# EAGLE board brain2_v11 (EAGLE 9.6.2)
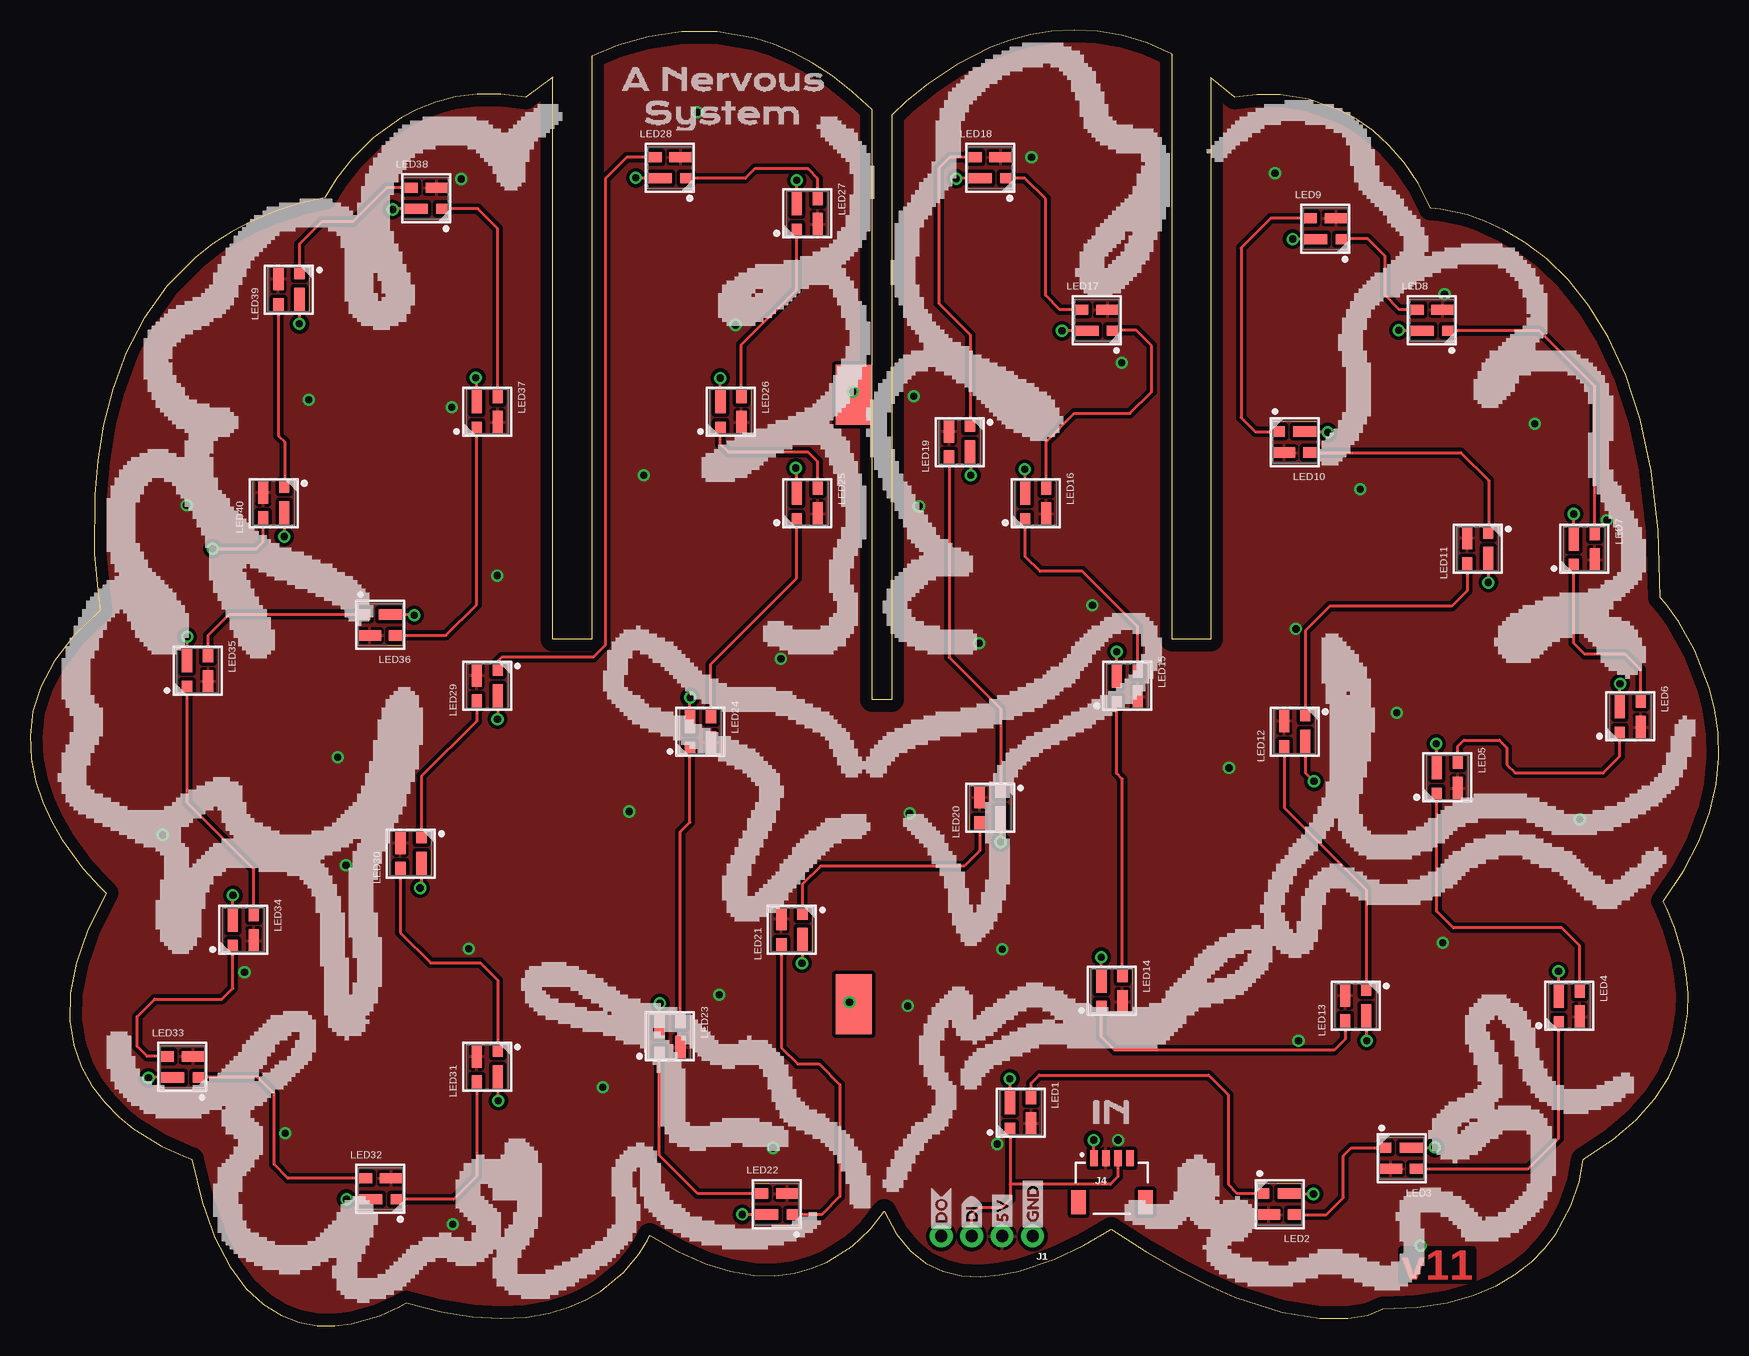
[diagram p0: board, top side]
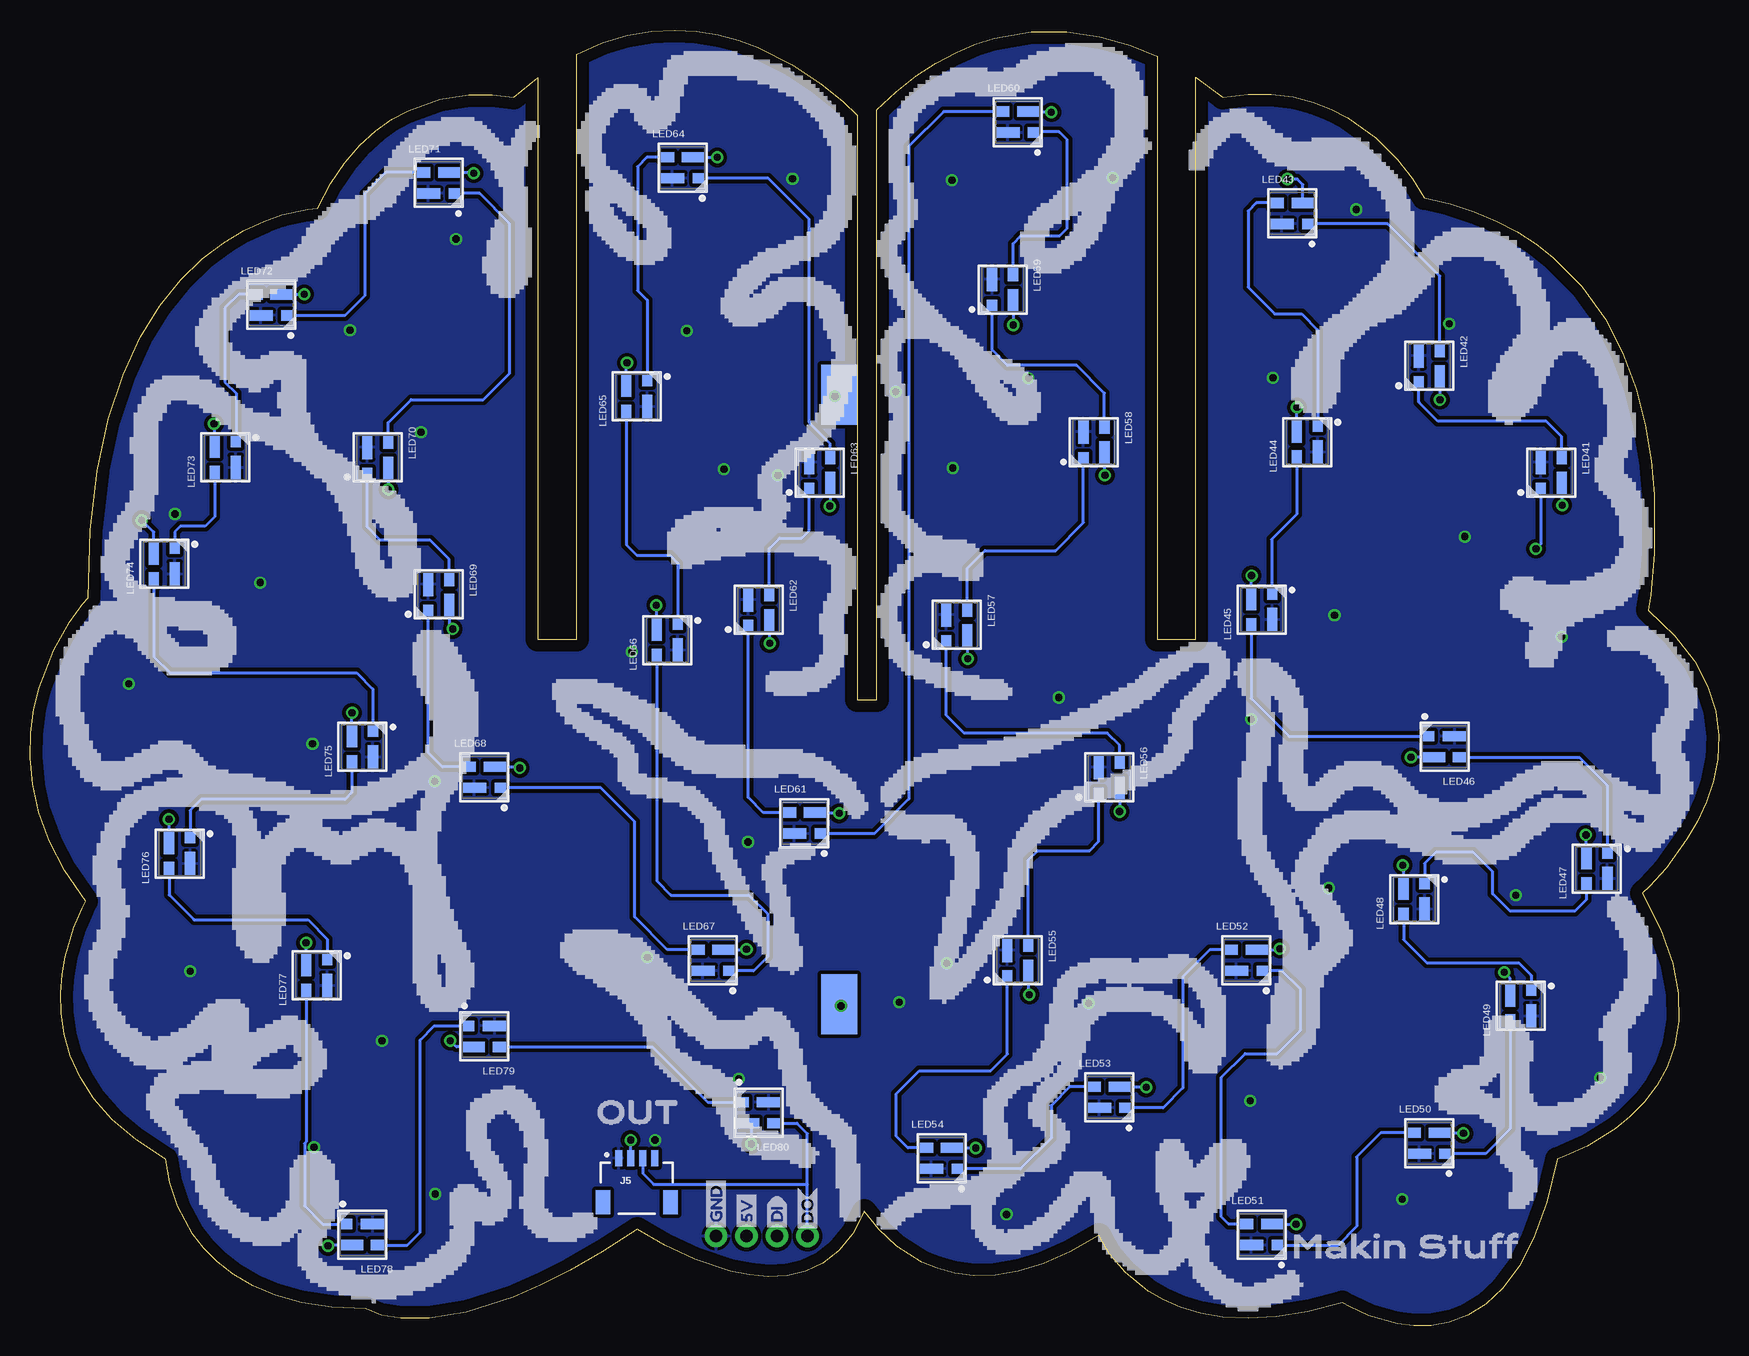
[diagram p1: board, bottom side, seen from below]

Size 140.73 x 107.98 mm. Coordinates in mm from the lower left corner, seen from the top.
Outline: 135.87,60.67 135.69,66.31 135.11,71.26 134.19,75.55 132.98,79.25 131.53,82.38 129.92,85.01 128.18,87.17 126.39,88.91 124.6,90.27 122.86,91.31 121.23,92.06 119.77,92.57 117.58,93.06 116.75,93.14 115.68,95.19 114.5,96.93 113.25,98.38 111.93,99.57 110.58,100.52 109.22,101.26 106.57,102.2 104.17,102.58 102.21,102.6 100.42,102.38 98.41,103.99 98.41,57.21 95.18,57.21 95.18,105.98 93.05,106.91 90.98,107.53 88.96,107.88 87.02,107.98 85.15,107.87 83.36,107.57 81.67,107.11 80.08,106.53 77.22,105.1 74.85,103.52 73.02,102.03 71.79,100.87 71.79,52.18 70.17,52.18 70.17,101.32 68.52,102.85 66.87,104.15 65.23,105.23 63.6,106.1 61.98,106.79 60.39,107.3 57.28,107.84 54.33,107.85 51.57,107.44 49.04,106.72 46.8,105.81 46.8,57.21 43.57,57.21 43.57,104.03 41.32,102.38 39.22,102.64 37.27,102.64 35.47,102.41 33.81,101.98 32.29,101.39 30.92,100.68 28.59,99 26.8,97.22 25.55,95.61 24.56,94 22.37,93.48 20.35,92.83 18.5,92.05 16.79,91.16 15.24,90.16 13.83,89.06 11.41,86.62 9.48,83.92 7.99,81.03 6.88,78.04 6.12,75.02 5.63,72.07 5.38,69.24 5.37,64.32 5.67,60.9 5.86,59.62 3.65,57.5 2.01,55.38 0.9,53.27 0.25,51.19 0,49.17 0.09,47.22 0.46,45.36 1.05,43.61 1.8,41.99 2.65,40.53 4.39,38.13 5.79,36.58 6.37,36.03 4.83,32.99 3.85,30.21 3.37,27.69 3.32,25.42 3.65,23.39 4.29,21.58 5.16,19.99 6.22,18.61 7.4,17.42 8.62,16.43 10.97,14.97 12.75,14.15 13.46,13.89 14.33,10.29 15.4,7.34 16.63,4.97 17.98,3.15 19.42,1.79 20.92,0.86 22.44,0.29 23.95,0.02 25.4,0 26.78,0.17 29.15,0.84 30.77,1.58 31.37,1.93 34.25,1.18 36.87,0.75 39.22,0.62 41.34,0.72 43.21,1.04 44.86,1.54 46.31,2.16 47.55,2.89 49.47,4.47 50.74,5.98 51.43,7.1 51.64,7.55 54.05,6.15 56.29,5.16 58.38,4.53 60.3,4.22 62.07,4.19 63.67,4.39 65.12,4.78 66.41,5.31 68.52,6.64 70.02,8.02 71.2,9.55 72.17,7.67 73.33,6.23 74.65,5.21 76.1,4.54 77.62,4.19 79.21,4.1 80.8,4.24 82.38,4.55 85.35,5.54 87.81,6.69 90.12,8.05 93.03,6.17 95.72,4.62 98.2,3.37 100.46,2.39 104.36,1.13 107.47,0.62 109.83,0.61 111.47,0.9 112.73,1.4 115.59,1.54 118.1,1.94 120.29,2.55 122.17,3.35 123.78,4.3 125.13,5.35 126.25,6.48 127.15,7.65 128.41,9.94 129.09,11.94 129.42,13.89 131.88,15.48 133.85,17.16 135.4,18.91 136.55,20.7 137.36,22.5 137.87,24.29 138.13,26.03 138.17,27.7 138.04,29.28 137.78,30.74 137.07,33.17 136.39,34.79 136.09,35.38 137.83,37.93 139.12,40.41 140,42.81 140.52,45.12 140.73,47.33 140.67,49.42 140.4,51.37 139.95,53.17 138.73,56.29 137.4,58.65 136.32,60.15 135.87,60.67
Copper layers (1*16): Top 0.035mm / dielectric 1.5mm / Bottom 0.035mm
Design rules "default": minimum track width 6mil, minimum drill 0.35mm, track to track 6mil, track to pad 6mil, pad to pad 6mil, via to via 6mil, smd to smd 6mil, copper to edge 40mil, drill to drill 6mil, minimum pad ring 10mil, minimum via ring 8mil, stop-mask expansion 4mil, vias tented up to drill 0mil, thermal gap 10mil
tKeepout: area 43.6,-2.7 to 46.5,57.1; area 70.2,7.2 to 71.7,52.2; area 95.2,2.9 to 98.3,57.2
bKeepout: area 95.1,0.9 to 98.4,57.2; area 70.1,5.7 to 71.8,52.2; area 43.4,-2.2 to 46.8,57.2

## Footprints (pad centres in the part's own frame; a part is rotated, then mirrored left to right if it is on the bottom)
1X04_NO_SILK = drill 1.016 pad 1.88: 1 0,0; 2 2.54,0; 3 5.08,0; 4 7.62,0
JST04_1MM_RA = smd 0.6 x 1.35: 1 -1.5,0; 2 -0.5,0; 3 0.5,0; 4 1.5,0 | smd 1.2 x 2: NC1 2.8,-3.675; NC2 -2.8,-3.675
5X3_SOLDER_PAD = smd 5 x 3: P$1 0,0
3.5X3.5_RGB_LED = smd 1.15 x 0.85: 1 -1.275,0.875 | smd 2 x 0.85: 2 -0.85,-0.875 | smd 1 x 0.85: 3 1.35,-0.875 | smd 1.9 x 0.85: 4 0.9,0.875

## Placement (x,y rotation side)
FRAME1  FRAME-LEDGER  [CREATIVE_COMMONS]  -80.02,1.25 0 top  (outside the outline)
FRAME2  FRAME-LEDGER  [CREATIVE_COMMONS]  -80.02,10.14 0 top  (outside the outline)
FRAME3  FRAME-LEDGER  [CREATIVE_COMMONS]  -80.02,19.03 0 top  (outside the outline)
J1  [1X04_NO_SILK]  83.56,7.48 180 top
J4  [JST04_1MM_RA]  90.16,13.95 0 top
J5  [JST04_1MM_RA]  90.16,13.95 0 bottom
J6  ELECTRO_MECH_PAD  [5X3_SOLDER_PAD]  68.65,77.58 90 top
J7  ELECTRO_MECH_PAD  [5X3_SOLDER_PAD]  68.65,26.78 90 top
J8  ELECTRO_MECH_PAD  [5X3_SOLDER_PAD]  73.27,77.58 270 bottom
J9  ELECTRO_MECH_PAD  [5X3_SOLDER_PAD]  73.27,26.78 270 bottom
LED1  3.5X3.5_RGB_LED3.5X3.5  [3.5X3.5_RGB_LED]  82.54,17.76 270 top
LED2  3.5X3.5_RGB_LED3.5X3.5  [3.5X3.5_RGB_LED]  104.13,10.14 180 top
LED3  3.5X3.5_RGB_LED3.5X3.5  [3.5X3.5_RGB_LED]  114.29,13.95 180 top
LED4  3.5X3.5_RGB_LED3.5X3.5  [3.5X3.5_RGB_LED]  128.26,26.65 270 top
LED5  3.5X3.5_RGB_LED3.5X3.5  [3.5X3.5_RGB_LED]  118.1,45.7 270 top
LED6  3.5X3.5_RGB_LED3.5X3.5  [3.5X3.5_RGB_LED]  133.34,50.78 270 top
LED7  3.5X3.5_RGB_LED3.5X3.5  [3.5X3.5_RGB_LED]  129.53,64.75 270 top
LED8  3.5X3.5_RGB_LED3.5X3.5  [3.5X3.5_RGB_LED]  116.83,83.8 0 top
LED9  3.5X3.5_RGB_LED3.5X3.5  [3.5X3.5_RGB_LED]  107.94,91.42 0 top
LED10  3.5X3.5_RGB_LED3.5X3.5  [3.5X3.5_RGB_LED]  105.4,73.64 180 top
LED11  3.5X3.5_RGB_LED3.5X3.5  [3.5X3.5_RGB_LED]  120.64,64.75 90 top
LED12  3.5X3.5_RGB_LED3.5X3.5  [3.5X3.5_RGB_LED]  105.4,49.51 90 top
LED13  3.5X3.5_RGB_LED3.5X3.5  [3.5X3.5_RGB_LED]  110.48,26.65 90 top
LED14  3.5X3.5_RGB_LED3.5X3.5  [3.5X3.5_RGB_LED]  90.16,27.92 270 top
LED15  3.5X3.5_RGB_LED3.5X3.5  [3.5X3.5_RGB_LED]  91.43,53.32 270 top
LED16  3.5X3.5_RGB_LED3.5X3.5  [3.5X3.5_RGB_LED]  83.81,68.56 270 top
LED17  3.5X3.5_RGB_LED3.5X3.5  [3.5X3.5_RGB_LED]  88.89,83.8 0 top
LED18  3.5X3.5_RGB_LED3.5X3.5  [3.5X3.5_RGB_LED]  80,96.5 0 top
LED19  3.5X3.5_RGB_LED3.5X3.5  [3.5X3.5_RGB_LED]  77.46,73.64 90 top
LED20  3.5X3.5_RGB_LED3.5X3.5  [3.5X3.5_RGB_LED]  80,43.16 90 top
LED21  3.5X3.5_RGB_LED3.5X3.5  [3.5X3.5_RGB_LED]  63.49,33 90 top
LED22  3.5X3.5_RGB_LED3.5X3.5  [3.5X3.5_RGB_LED]  62.22,10.14 0 top
LED23  3.5X3.5_RGB_LED3.5X3.5  [3.5X3.5_RGB_LED]  53.33,24.11 270 top
LED24  3.5X3.5_RGB_LED3.5X3.5  [3.5X3.5_RGB_LED]  55.87,49.51 270 top
LED25  3.5X3.5_RGB_LED3.5X3.5  [3.5X3.5_RGB_LED]  64.76,68.56 270 top
LED26  3.5X3.5_RGB_LED3.5X3.5  [3.5X3.5_RGB_LED]  58.41,76.18 270 top
LED27  3.5X3.5_RGB_LED3.5X3.5  [3.5X3.5_RGB_LED]  64.76,92.69 270 top
LED28  3.5X3.5_RGB_LED3.5X3.5  [3.5X3.5_RGB_LED]  53.33,96.5 0 top
LED29  3.5X3.5_RGB_LED3.5X3.5  [3.5X3.5_RGB_LED]  38.09,53.32 90 top
LED30  3.5X3.5_RGB_LED3.5X3.5  [3.5X3.5_RGB_LED]  31.74,39.35 90 top
LED31  3.5X3.5_RGB_LED3.5X3.5  [3.5X3.5_RGB_LED]  38.09,21.57 90 top
LED32  3.5X3.5_RGB_LED3.5X3.5  [3.5X3.5_RGB_LED]  29.2,11.41 0 top
LED33  3.5X3.5_RGB_LED3.5X3.5  [3.5X3.5_RGB_LED]  12.69,21.57 0 top
LED34  3.5X3.5_RGB_LED3.5X3.5  [3.5X3.5_RGB_LED]  17.77,33 270 top
LED35  3.5X3.5_RGB_LED3.5X3.5  [3.5X3.5_RGB_LED]  13.96,54.59 270 top
LED36  3.5X3.5_RGB_LED3.5X3.5  [3.5X3.5_RGB_LED]  29.2,58.4 180 top
LED37  3.5X3.5_RGB_LED3.5X3.5  [3.5X3.5_RGB_LED]  38.09,76.18 270 top
LED38  3.5X3.5_RGB_LED3.5X3.5  [3.5X3.5_RGB_LED]  33.01,93.96 0 top
LED39  3.5X3.5_RGB_LED3.5X3.5  [3.5X3.5_RGB_LED]  21.58,86.34 90 top
LED40  3.5X3.5_RGB_LED3.5X3.5  [3.5X3.5_RGB_LED]  20.31,68.56 90 top
LED41  3.5X3.5_RGB_LED3.5X3.5  [3.5X3.5_RGB_LED]  13.96,71.1 270 bottom
LED42  3.5X3.5_RGB_LED3.5X3.5  [3.5X3.5_RGB_LED]  24.12,79.99 270 bottom
LED43  3.5X3.5_RGB_LED3.5X3.5  [3.5X3.5_RGB_LED]  35.55,92.69 0 bottom
LED44  3.5X3.5_RGB_LED3.5X3.5  [3.5X3.5_RGB_LED]  34.28,73.64 90 bottom
LED45  3.5X3.5_RGB_LED3.5X3.5  [3.5X3.5_RGB_LED]  38.09,59.67 90 bottom
LED46  3.5X3.5_RGB_LED3.5X3.5  [3.5X3.5_RGB_LED]  22.85,48.24 180 bottom
LED47  3.5X3.5_RGB_LED3.5X3.5  [3.5X3.5_RGB_LED]  10.15,38.08 90 bottom
LED48  3.5X3.5_RGB_LED3.5X3.5  [3.5X3.5_RGB_LED]  25.39,35.54 90 bottom
LED49  3.5X3.5_RGB_LED3.5X3.5  [3.5X3.5_RGB_LED]  16.5,26.65 90 bottom
LED50  3.5X3.5_RGB_LED3.5X3.5  [3.5X3.5_RGB_LED]  24.12,15.22 0 bottom
LED51  3.5X3.5_RGB_LED3.5X3.5  [3.5X3.5_RGB_LED]  38.09,7.6 0 bottom
LED52  3.5X3.5_RGB_LED3.5X3.5  [3.5X3.5_RGB_LED]  39.36,30.46 0 bottom
LED53  3.5X3.5_RGB_LED3.5X3.5  [3.5X3.5_RGB_LED]  50.79,19.03 0 bottom
LED54  3.5X3.5_RGB_LED3.5X3.5  [3.5X3.5_RGB_LED]  64.76,13.95 0 bottom
LED55  3.5X3.5_RGB_LED3.5X3.5  [3.5X3.5_RGB_LED]  58.41,30.46 270 bottom
LED56  3.5X3.5_RGB_LED3.5X3.5  [3.5X3.5_RGB_LED]  50.79,45.7 270 bottom
LED57  3.5X3.5_RGB_LED3.5X3.5  [3.5X3.5_RGB_LED]  63.49,58.4 270 bottom
LED58  3.5X3.5_RGB_LED3.5X3.5  [3.5X3.5_RGB_LED]  52.06,73.64 270 bottom
LED59  3.5X3.5_RGB_LED3.5X3.5  [3.5X3.5_RGB_LED]  59.68,86.34 270 bottom
LED60  3.5X3.5_RGB_LED3.5X3.5  [3.5X3.5_RGB_LED]  58.41,100.31 0 bottom
LED61  3.5X3.5_RGB_LED3.5X3.5  [3.5X3.5_RGB_LED]  76.19,41.89 0 bottom
LED62  3.5X3.5_RGB_LED3.5X3.5  [3.5X3.5_RGB_LED]  80,59.67 270 bottom
LED63  3.5X3.5_RGB_LED3.5X3.5  [3.5X3.5_RGB_LED]  74.92,71.1 270 bottom
LED64  3.5X3.5_RGB_LED3.5X3.5  [3.5X3.5_RGB_LED]  86.35,96.5 0 bottom
LED65  3.5X3.5_RGB_LED3.5X3.5  [3.5X3.5_RGB_LED]  90.16,77.45 90 bottom
LED66  3.5X3.5_RGB_LED3.5X3.5  [3.5X3.5_RGB_LED]  87.62,57.13 90 bottom
LED67  3.5X3.5_RGB_LED3.5X3.5  [3.5X3.5_RGB_LED]  83.81,30.46 0 bottom
LED68  3.5X3.5_RGB_LED3.5X3.5  [3.5X3.5_RGB_LED]  102.86,45.7 0 bottom
LED69  3.5X3.5_RGB_LED3.5X3.5  [3.5X3.5_RGB_LED]  106.67,60.94 270 bottom
LED70  3.5X3.5_RGB_LED3.5X3.5  [3.5X3.5_RGB_LED]  111.75,72.37 270 bottom
LED71  3.5X3.5_RGB_LED3.5X3.5  [3.5X3.5_RGB_LED]  106.67,95.23 0 bottom
LED72  3.5X3.5_RGB_LED3.5X3.5  [3.5X3.5_RGB_LED]  120.64,85.07 0 bottom
LED73  3.5X3.5_RGB_LED3.5X3.5  [3.5X3.5_RGB_LED]  124.45,72.37 90 bottom
LED74  3.5X3.5_RGB_LED3.5X3.5  [3.5X3.5_RGB_LED]  129.53,63.48 90 bottom
LED75  3.5X3.5_RGB_LED3.5X3.5  [3.5X3.5_RGB_LED]  113.02,48.24 90 bottom
LED76  3.5X3.5_RGB_LED3.5X3.5  [3.5X3.5_RGB_LED]  128.26,39.35 90 bottom
LED77  3.5X3.5_RGB_LED3.5X3.5  [3.5X3.5_RGB_LED]  116.83,29.19 90 bottom
LED78  3.5X3.5_RGB_LED3.5X3.5  [3.5X3.5_RGB_LED]  113.02,7.6 180 bottom
LED79  3.5X3.5_RGB_LED3.5X3.5  [3.5X3.5_RGB_LED]  102.86,24.11 180 bottom
LED80  3.5X3.5_RGB_LED3.5X3.5  [3.5X3.5_RGB_LED]  80,17.76 180 bottom
U$1  A_NERVOUS0  [A_NERVOUS0]  47.74,103.87 0 top
U$2  SYSTEM1  [SYSTEM1]  49.52,101.07 0 top
U$3  MAKIN_STUFF2  [MAKIN_STUFF2]  37.2,6.59 0 bottom
U$4  5V1  [5V1]  81.02,7.73 90 top
U$5  5V1  [5V1]  81.02,7.73 90 bottom
U$6  GND0  [GND0]  83.56,7.73 90 top
U$7  GND0  [GND0]  83.56,7.73 90 bottom
U$8  DI0  [DI0]  78.48,7.73 90 top
U$9  DI0  [DI0]  78.48,7.73 90 bottom
U$10  DO3  [DO3]  75.94,7.6 90 top
U$11  DO3  [DO3]  75.94,7.6 90 bottom
U$12  IN0  [IN0]  86.86,17.76 0 top
U$13  OUT1  [OUT1]  95.12,17.76 0 bottom
U$14  BRAIN2_PCB_TOP_SILK  [BRAIN2_PCB_TOP_SILK]  69.84,54.59 0 top
U$15  BRAIN2_PCB_BOT_SILK  [BRAIN2_PCB_BOT_SILK]  70.35,54.21 0 bottom

## Library data of the parts
FRAME1-FRAME3 = SparkFun-Aesthetics
J1 = SparkFun-Connectors
J4 J5 = SparkFun-Connectors; COLOR: BLACK; PROD_ID: CONN-13694
J6-J9 LED1-LED80 U$1-U$15 = brain

## Nets
5V: J1.2 J4.2 J5.2 LED1.4 LED2.4 LED3.4 LED4.4 LED5.4 LED6.4 LED7.4 LED8.4 LED9.4 LED10.4 LED11.4 LED12.4 LED13.4 LED14.4 LED15.4 LED16.4 LED17.4 LED18.4 LED19.4 LED20.4 LED21.4 LED22.4 LED23.4 LED24.4 LED25.4 LED26.4 LED27.4 LED28.4 LED29.4 LED30.4 LED31.4 LED32.4 LED33.4 LED34.4 LED35.4 LED36.4 LED37.4 LED38.4 LED39.4 LED40.4 LED41.4 LED42.4 LED43.4 LED44.4 LED45.4 LED46.4 LED47.4 LED48.4 LED49.4 LED50.4 LED51.4 LED52.4 LED53.4 LED54.4 LED55.4 LED56.4 LED57.4 LED58.4 LED59.4 LED60.4 LED61.4 LED62.4 LED63.4 LED64.4 LED65.4 LED66.4 LED67.4 LED68.4 LED69.4 LED70.4 LED71.4 LED72.4 LED73.4 LED74.4 LED75.4 LED76.4 LED77.4 LED78.4 LED79.4 LED80.4
DI: J1.3 J4.3 LED1.3
DO: J1.4 J5.3 LED80.1
DO_1: LED40.1 LED41.3
GND: J1.1 J4.1 J5.1 LED1.2 LED2.2 LED3.2 LED4.2 LED5.2 LED6.2 LED7.2 LED8.2 LED9.2 LED10.2 LED11.2 LED12.2 LED13.2 LED14.2 LED15.2 LED16.2 LED17.2 LED18.2 LED19.2 LED20.2 LED21.2 LED22.2 LED23.2 LED24.2 LED25.2 LED26.2 LED27.2 LED28.2 LED29.2 LED30.2 LED31.2 LED32.2 LED33.2 LED34.2 LED35.2 LED36.2 LED37.2 LED38.2 LED39.2 LED40.2 LED41.2 LED42.2 LED43.2 LED44.2 LED45.2 LED46.2 LED47.2 LED48.2 LED49.2 LED50.2 LED51.2 LED52.2 LED53.2 LED54.2 LED55.2 LED56.2 LED57.2 LED58.2 LED59.2 LED60.2 LED61.2 LED62.2 LED63.2 LED64.2 LED65.2 LED66.2 LED67.2 LED68.2 LED69.2 LED70.2 LED71.2 LED72.2 LED73.2 LED74.2 LED75.2 LED76.2 LED77.2 LED78.2 LED79.2 LED80.2
N$1: LED1.1 LED2.3
N$2: LED2.1 LED3.3
N$3: LED3.1 LED4.3
N$4: LED4.1 LED5.3
N$5: LED6.1 LED7.3
N$6: LED7.1 LED8.3
N$7: LED8.1 LED9.3
N$8: LED9.1 LED10.3
N$9: LED11.1 LED12.3
N$10: LED5.1 LED6.3
N$11: LED12.1 LED13.3
N$12: LED13.1 LED14.3
N$13: LED14.1 LED15.3
N$14: LED16.1 LED17.3
N$15: LED17.1 LED18.3
N$16: LED18.1 LED19.3
N$17: LED19.1 LED20.3
N$18: LED15.1 LED16.3
N$19: LED21.1 LED22.3
N$20: LED22.1 LED23.3
N$21: LED23.1 LED24.3
N$22: LED24.1 LED25.3
N$23: LED26.1 LED27.3
N$24: LED27.1 LED28.3
N$25: LED28.1 LED29.3
N$26: LED29.1 LED30.3
N$27: LED25.1 LED26.3
N$28: LED31.1 LED32.3
N$29: LED32.1 LED33.3
N$30: LED33.1 LED34.3
N$31: LED34.1 LED35.3
N$32: LED36.1 LED37.3
N$33: LED37.1 LED38.3
N$34: LED38.1 LED39.3
N$35: LED39.1 LED40.3
N$36: LED35.1 LED36.3
N$37: LED10.1 LED11.3
N$38: LED20.1 LED21.3
N$39: LED30.1 LED31.3
N$40: LED41.1 LED42.3
N$41: LED42.1 LED43.3
N$42: LED43.1 LED44.3
N$43: LED44.1 LED45.3
N$44: LED46.1 LED47.3
N$45: LED47.1 LED48.3
N$46: LED48.1 LED49.3
N$47: LED49.1 LED50.3
N$48: LED45.1 LED46.3
N$49: LED51.1 LED52.3
N$50: LED52.1 LED53.3
N$51: LED53.1 LED54.3
N$52: LED54.1 LED55.3
N$53: LED56.1 LED57.3
N$54: LED57.1 LED58.3
N$55: LED58.1 LED59.3
N$56: LED59.1 LED60.3
N$57: LED55.1 LED56.3
N$58: LED61.1 LED62.3
N$59: LED62.1 LED63.3
N$60: LED63.1 LED64.3
N$61: LED64.1 LED65.3
N$62: LED66.1 LED67.3
N$63: LED67.1 LED68.3
N$64: LED68.1 LED69.3
N$65: LED69.1 LED70.3
N$66: LED65.1 LED66.3
N$67: LED71.1 LED72.3
N$68: LED72.1 LED73.3
N$69: LED73.1 LED74.3
N$70: LED74.1 LED75.3
N$71: LED76.1 LED77.3
N$72: LED77.1 LED78.3
N$73: LED78.1 LED79.3
N$74: LED79.1 LED80.3
N$75: LED75.1 LED76.3
N$76: LED50.1 LED51.3
N$77: LED60.1 LED61.3
N$78: LED70.1 LED71.3

## Tracks (layer width: path | path; a pad name or v marks a point on that pad's centre or on a via)
5V  (via drill 0.6)
  Bottom 0.254: LED41.4 13.09,68.42 v13.05,68.38 | LED42.4 23.25,77.19 v23.23,77.17 | LED43.4 34.65,95.09 35.12,95.56 v35.93,95.56 | LED44.4 35.16,76.53 v35.15,76.54 | LED45.4 38.97,62.48 v38.93,62.52 | LED46.4 25.64,47.37 v25.65,47.38 | LED47.4 11.03,40.86 v11.07,40.9 | LED48.4 26.27,38.32 v26.33,38.39 | LED49.4 17.38,28.95 v17.87,29.45 | LED50.4 21.34,16.1 v21.28,16.04 | LED51.4 35.23,8.48 v35.22,8.47 | LED52.4 36.66,31.34 v36.57,31.43 | LED53.4 47.76,19.91 v47.72,19.87 | LED54.4 61.93,14.83 v61.92,14.82 | LED55.4 57.54,27.68 v57.45,27.59 | LED56.4 49.92,42.87 v49.93,42.86 | LED57.4 62.62,55.62 v62.58,55.58 | LED58.4 51.19,70.91 v51.15,70.87 | LED59.4 58.81,83.41 v58.79,83.4 | LED60.4 55.68,101.19 v55.62,101.13 | LED61.4 73.36,42.77 v73.3,42.71 | LED62.4 79.13,56.92 v79.09,56.88 | LED63.4 74.05,68.35 v74.08,68.31 | LED64.4 83.47,97.38 v83.46,97.37 | LED65.4 91.04,80.18 v90.98,80.25 | LED66.4 88.5,60.01 v88.54,60.05 | LED67.4 81.06,31.34 v81.02,31.38 | LED68.4 100,46.58 v99.92,46.49 | LED69.4 105.8,58.37 v105.49,58.07 | LED70.4 110.88,69.72 v110.86,69.71 | LED71.4 103.81,96.11 v103.75,96.05 | LED72.4 117.89,85.95 v117.87,85.96 | LED73.4 125.33,75.1 v125.39,75.17 | LED74.4 130.41,66.14 v131.41,67.14 | LED75.4 113.9,51.08 v113.89,51.09 | LED76.4 129.14,42.21 v129.15,42.22 | LED77.4 117.71,31.9 v117.72,31.91 | LED78.4 115.83,6.73 v115.89,6.66 | LED79.4 105.19,23.24 v105.71,23.76 | LED80.4 80.61,16.6 v80.61,15.15 | J5.2 v90.66,15.47 v90.67,15.48
  other vias: 73.65,77.45 73.14,26.65
  pour Top (isolate 0.305): -0.01,-0.02 -0.01,107.93 140.96,107.93 140.96,-0.02
DI
  Top 0.254: LED1.3 81.67,11.79 | 81.67,11.79 81.67,10.52 81.03,9.89 79.11,9.89 78.48,9.25 J1.3 | J4.3 90.66,12.42 90.04,11.79 81.67,11.79
DO
  Bottom 0.254: LED80.1 76.82,16.89 75.94,16 75.94,11.79 | J1.4 75.94,11.79 | J5.3 89.66,12.69 88.77,11.79 75.94,11.79
DO_1  (via drill 0.6)
  Top 0.254: v15.23,64.75 18.86,64.75 19.44,65.33 LED40.1
  Bottom 0.254: LED41.3 14.84,65.15 v15.23,64.75
GND  (via drill 0.6)
  Top 0.254: LED1.2 81.67,20.57 v81.65,20.58 | LED2.2 106.92,11.02 v106.95,10.98 | LED3.2 117.02,14.83 v117.06,14.87 | LED4.2 127.39,29.53 v127.37,29.55 | LED5.2 117.23,48.46 v117.19,48.5 | LED6.2 132.47,53.46 v132.5,53.5 | LED7.2 128.66,67.63 v128.64,67.65 | LED8.2 114.1,82.93 v114.06,82.96 | LED9.2 105.24,90.55 v105.22,90.56 | LED10.2 108.08,74.52 v108.15,74.46 | LED11.2 121.52,61.95 v121.53,61.93 | LED13.2 111.36,23.8 v111.4,23.76 | LED14.2 89.29,30.7 v89.27,30.72 | LED15.2 90.56,56.16 v90.57,56.17 | LED16.2 82.94,71.34 v82.9,71.38 | LED17.2 86.01,82.93 v86,82.91 | LED18.2 77.22,95.63 v77.18,95.59 | LED19.2 78.4,72.73 v78.4,70.87 | LED20.2 80.88,40.33 v80.89,40.32 | LED21.2 64.37,30.25 v64.33,30.21 | LED22.2 59.36,9.27 v59.35,9.28 | LED23.2 52.46,26.84 v52.49,26.88 | LED24.2 55,52.35 v55.01,52.36 | LED25.2 63.89,71.42 v63.82,71.48 | LED26.2 57.54,78.96 v57.52,78.98 | LED27.2 63.89,95.45 v63.9,95.46 | LED28.2 50.52,95.63 v50.49,95.66 | LED29.2 38.97,50.57 v38.96,50.55 | LED30.2 32.62,36.6 v32.5,36.48 | LED31.2 38.97,18.82 v39.03,18.75 | LED32.2 26.39,10.54 v26.38,10.55 | LED33.2 9.91,20.7 v9.87,20.66 | LED34.2 16.9,35.86 v16.91,35.87 | LED35.2 13.09,57.4 v13.1,57.41 | LED36.2 31.96,59.28 v32.02,59.22 | LED37.2 37.22,78.94 v37.15,79 | LED38.2 30.28,93.09 v30.22,93.02 | LED39.2 22.46,83.51 v22.45,83.5 | LED40.2 21.19,65.78 v21.18,65.77 | LED12.2 106.28,46.1 v107,45.37 | J4.1 88.66,15.45 v88.64,15.48
  other vias: 68.57,77.83 68.29,26.96
  pour Bottom (isolate 0.305): -0.01,-0.02 -0.01,107.93 140.96,107.93 140.96,-0.02
N$1
  Top 0.254: LED1.1 83.42,20.21 84.09,20.89 98.21,20.89 99.86,19.24 99.86,11.78 100.62,11.02 LED2.3
N$2
  Top 0.254: LED2.1 108.03,9.27 109.44,10.68 109.44,14.16 110.11,14.83 LED3.3
N$3
  Top 0.254: LED3.1 124.85,13.08 127.39,15.62 LED4.3
N$4
  Top 0.254: LED4.1 129.14,31.67 127.65,33.15 118.61,33.15 117.23,34.54 LED5.3
N$5
  Top 0.254: LED6.1 134.22,54.68 132.94,55.96 129.56,55.96 128.66,56.86 LED7.3
N$6
  Top 0.254: LED7.1 130.41,78.28 125.76,82.93 LED8.3
N$7
  Top 0.254: LED9.3 109.33,90.58 111.47,90.58 112.92,89.14 112.92,85.86 114.1,84.68 LED8.1
N$8
  Top 0.254: LED9.1 103.41,92.3 100.93,89.82 100.93,75.67 102.1,74.51 LED10.3
N$9
  Top 0.254: LED11.1 119.77,61.26 118.48,59.98 108.32,59.98 106.28,57.93 LED12.3
N$10
  Top 0.254: LED5.1 118.98,48.28 119.5,48.8 122.45,48.8 123.08,48.17 123.08,46.77 123.77,46.08 131.11,46.08 132.47,47.44 LED6.3
N$11
  Top 0.254: LED12.1 104.53,43.15 111.36,36.32 LED13.3
N$12
  Top 0.254: LED13.1 109.61,23.9 108.68,22.97 90.39,22.97 89.29,24.07 LED14.3
N$13
  Top 0.254: LED14.1 91.04,45.56 90.56,46.04 LED15.3
N$14
  Top 0.254: LED16.1 84.69,73.68 87.04,76.03 91.66,76.03 93.46,77.83 93.46,81.67 92.17,82.96 90.28,82.96 LED17.3
N$15
  Top 0.254: LED17.1 85.81,84.68 84.63,85.86 84.63,93.91 82.91,95.63 LED18.3
N$16
  Top 0.254: LED18.1 76.66,97.38 75.74,96.45 75.74,85.2 78.35,82.58 78.35,75.01 LED19.3
N$17
  Top 0.254: LED19.1 76.59,55.7 80.88,51.41 LED20.3
N$18
  Top 0.254: LED15.1 92.31,58.26 87.7,62.87 84.17,62.87 82.94,64.1 LED16.3
N$19
  Top 0.254: LED21.1 62.62,23.18 63.98,21.83 65.75,21.83 67.48,20.1 67.48,10.78 65.97,9.27 LED22.3
N$20
  Top 0.254: LED22.1 55.66,11.02 52.46,14.22 LED23.3
N$21
  Top 0.254: LED23.1 54.21,41.17 55,41.96 LED24.3
N$22
  Top 0.254: LED24.1 56.75,55.14 63.89,62.28 LED25.3
N$23
  Top 0.254: LED26.1 59.29,81.76 63.89,86.36 LED27.3
N$24
  Top 0.254: LED27.1 65.64,95.6 64.84,96.4 60.39,96.4 59.62,95.63 LED28.3
N$25
  Top 0.254: LED28.1 49.74,97.38 47.95,95.59 47.95,56.73 46.95,55.72 39.33,55.72 38.97,55.36 LED29.3
N$26
  Top 0.254: LED29.1 37.22,50.39 32.62,45.79 LED30.3
N$27
  Top 0.254: LED25.1 65.64,72.01 64.86,72.78 58.21,72.78 57.54,73.45 LED26.3
N$28
  Top 0.254: LED31.1 37.22,12.44 35.31,10.54 LED32.3
N$29
  Top 0.254: LED32.1 21.49,12.29 20.34,13.44 20.34,19.34 18.98,20.7 LED33.3
N$30
  Top 0.254: LED33.1 9.76,22.45 8.93,23.27 8.93,25.76 10.38,27.21 15.99,27.21 16.9,28.11 LED34.3
N$31
  Top 0.254: LED34.1 18.65,38.05 13.09,43.61 LED35.3
N$32
  Top 0.254: LED36.1 34.65,57.53 37.22,60.09 LED37.3
N$33
  Top 0.254: LED37.1 38.97,91.44 37.32,93.09 LED38.3
N$34
  Top 0.254: LED38.1 29.75,94.84 26.92,92.01 24.33,92.01 22.46,90.14 LED39.3
N$35
  Top 0.254: LED39.1 20.71,74.19 21.23,73.67 21.23,69.95 LED40.3
N$36
  Top 0.254: LED35.1 14.84,57.52 16.6,59.29 27.84,59.29 LED36.3
N$37
  Top 0.254: LED10.1 119.23,72.77 121.56,70.44 121.56,66.14 LED11.3
N$38
  Top 0.254: LED20.1 79.13,39.6 77.84,38.31 65.88,38.31 64.37,36.8 LED21.3
N$39
  Top 0.254: LED30.1 30.87,32.76 33.39,30.23 37.53,30.23 38.97,28.8 LED31.3
N$40
  Bottom 0.254: LED41.1 13.09,74.09 14.39,75.4 23.41,75.4 25,76.98 LED42.3
N$41
  Bottom 0.254: LED42.1 23.25,87.47 27.59,91.82 LED43.3
N$42
  Bottom 0.254: LED43.1 38.54,93.57 39.21,92.9 39.21,86.55 37,84.34 34.77,84.34 33.41,82.98 LED44.3
N$43
  Bottom 0.254: LED44.1 35.16,67.64 37.25,65.54 37.25,61.06 LED45.3
N$44
  Bottom 0.254: LED46.1 11.61,47.37 9.28,45.03 LED47.3
N$45
  Bottom 0.254: LED47.1 11.03,35.51 11.98,34.55 17.39,34.55 18.84,36 18.84,37.85 20.44,39.45 23.59,39.45 24.52,38.53 LED48.3
N$46
  Bottom 0.254: LED48.1 26.27,32.18 24.33,30.23 16.65,30.23 15.63,29.21 LED49.3
N$47
  Bottom 0.254: LED49.1 17.38,16.4 19.43,14.35 LED50.3
N$48
  Bottom 0.254: LED45.1 38.97,52.29 35.79,49.12 LED46.3
N$49
  Bottom 0.254: LED51.1 40.85,8.48 41.45,9.08 41.45,20.71 39.46,22.69 36.8,22.69 34.84,24.65 34.84,28.02 36.4,29.59 LED52.3
N$50
  Bottom 0.254: LED52.1 42.4,31.34 44.65,29.09 44.65,19.82 46.31,18.16 LED53.3
N$51
  Bottom 0.254: LED53.1 54.08,19.91 55.64,18.35 55.64,15.63 58.2,13.08 LED54.3
N$52
  Bottom 0.254: LED54.1 67.57,14.83 68.52,15.78 68.52,19.34 66.62,21.24 60.67,21.24 59.29,22.63 LED55.3
N$53
  Bottom 0.254: LED56.1 49.92,48.36 50.94,49.39 62.88,49.39 64.37,50.87 LED57.3
N$54
  Bottom 0.254: LED57.1 62.62,63.14 61.16,64.6 55.26,64.6 52.94,66.93 LED58.3
N$55
  Bottom 0.254: LED58.1 51.19,77.72 53.51,80.04 59.28,80.04 60.56,81.32 LED59.3
N$56
  Bottom 0.254: LED59.1 58.81,90.19 58.16,90.84 54.91,90.84 54.3,91.45 54.3,98.84 54.96,99.5 57,99.5 LED60.3
N$57
  Bottom 0.254: LED55.1 57.54,38.83 56.76,39.61 52.42,39.61 51.67,40.36 LED56.3
N$58
  Bottom 0.254: LED61.1 79.61,42.77 80.88,44.04 LED62.3
N$59
  Bottom 0.254: LED62.1 79.13,64.76 78.25,65.64 76.42,65.64 75.8,66.27 LED63.3
N$60
  Bottom 0.254: LED63.1 74.05,73.52 75.83,75.3 75.83,92.25 79.2,95.63 LED64.3
N$61
  Bottom 0.254: LED64.1 89.31,97.38 90.09,96.6 90.09,86.27 89.29,85.47 LED65.3
N$62
  Bottom 0.254: LED66.1 88.5,37.08 87.32,35.9 80.84,35.9 79.27,34.32 79.27,30.74 80.43,29.57 82.45,29.57 LED67.3
N$63
  Bottom 0.254: LED67.1 87.61,31.34 90.34,34.07 90.34,42.02 93.15,44.83 LED68.3
N$64
  Bottom 0.254: LED68.1 106.35,46.58 107.55,47.77 LED69.3
N$65
  Bottom 0.254: LED69.1 105.8,63.88 107.38,65.46 111.52,65.46 112.63,66.57 LED70.3
N$66
  Bottom 0.254: LED65.1 91.04,65.07 90.16,64.19 87.39,64.19 86.75,63.55 LED66.3
N$67
  Bottom 0.254: LED71.1 111.08,96.11 112.84,94.34 112.84,85.83 114.5,84.18 119.28,84.18 LED72.3
N$68
  Bottom 0.254: LED72.1 123.35,85.95 124.48,84.82 124.48,78.65 123.54,77.71 123.54,73.76 LED73.3
N$69
  Bottom 0.254: LED73.1 125.33,67.43 126.13,66.63 128.19,66.63 128.66,66.16 LED74.3
N$70
  Bottom 0.254: LED74.1 130.41,55.77 129.05,54.41 113.51,54.41 112.15,53.06 LED75.3
N$71
  Bottom 0.254: LED76.1 129.14,35.91 127.04,33.82 117.54,33.82 115.96,32.23 LED77.3
N$72
  Bottom 0.254: LED77.1 117.71,15.33 117.84,15.19 117.84,9.99 116.32,8.47 114.38,8.47 LED78.3
N$73
  Bottom 0.254: LED78.1 109.27,6.73 108.22,7.78 108.22,23.81 107.04,24.99 LED79.3
N$74
  Bottom 0.254: LED79.1 88.86,23.24 84.26,18.64 LED80.3
N$75
  Bottom 0.254: LED75.1 113.9,44.45 114.47,43.87 126.46,43.87 127.39,42.95 LED76.3
N$76
  Bottom 0.254: LED50.1 28.15,16.1 30.17,14.08 30.17,8.29 31.77,6.69 36.7,6.69 LED51.3
N$77
  Bottom 0.254: LED60.1 64.6,101.19 67.48,98.31 67.48,43.9 70.36,41.02 LED61.3
N$78
  Bottom 0.254: LED70.1 110.88,75.25 108.96,77.17 102.94,77.17 100.75,79.36 100.75,91.85 103.26,94.36 LED71.3

## Text on the board
Top: v11